# Altium PCB Electronic Dice.PcbDoc
Units mm, origin at the board's own origin, x right, y up, seen from the top; angles counter-clockwise.
Board outline 102.6 x 102.6 mm, 2 copper layers (Top Layer, Bottom Layer), stack 0.325 mm thick; 26 components, 21 nets, 81 pads, 0 vias.
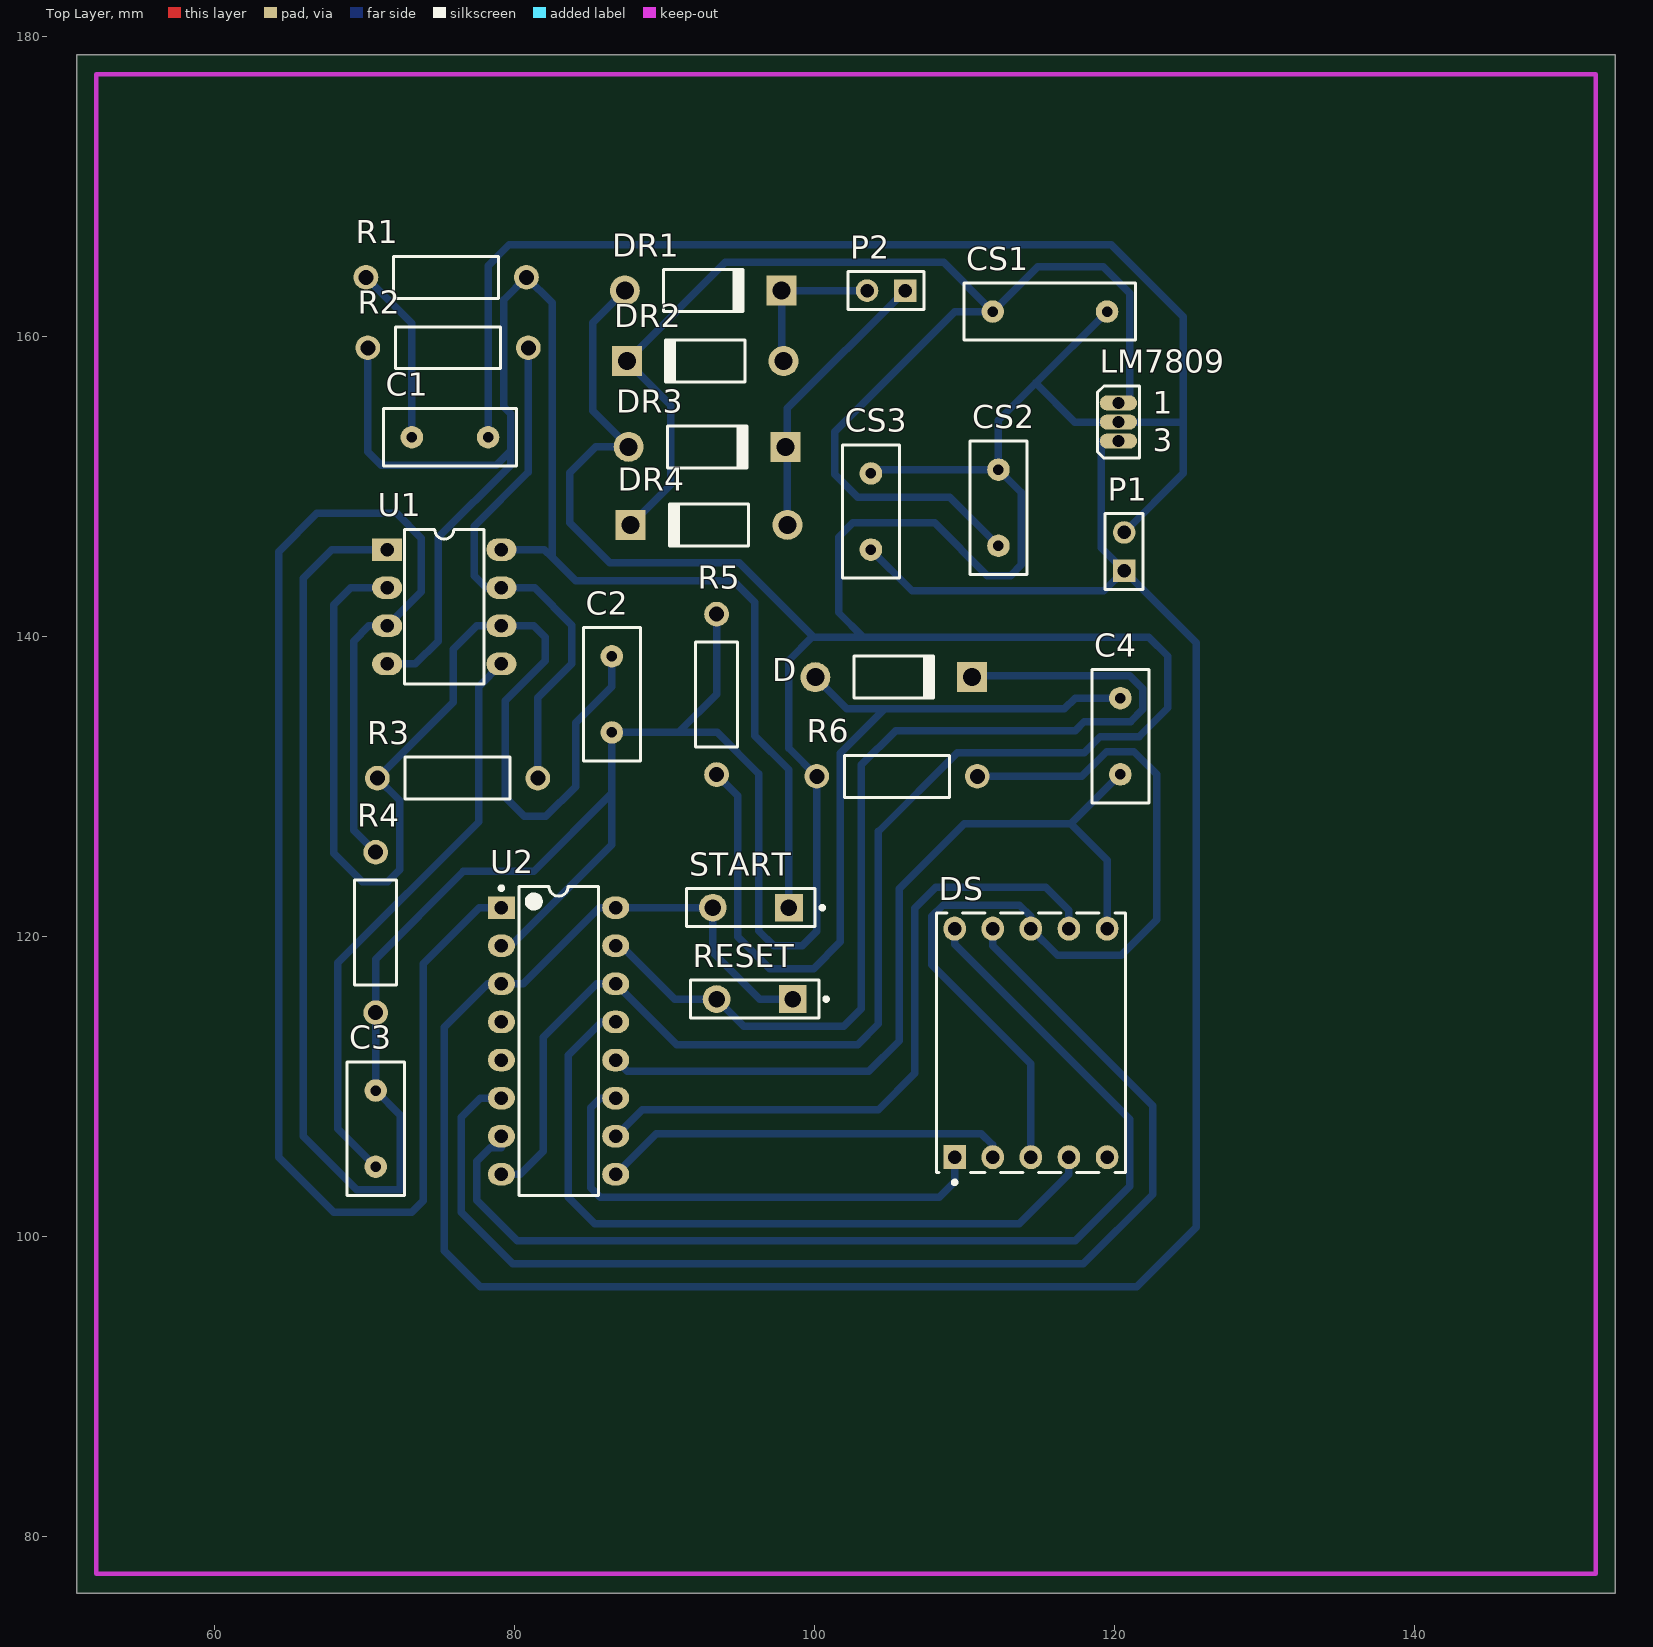
[diagram p0: Top Layer view]
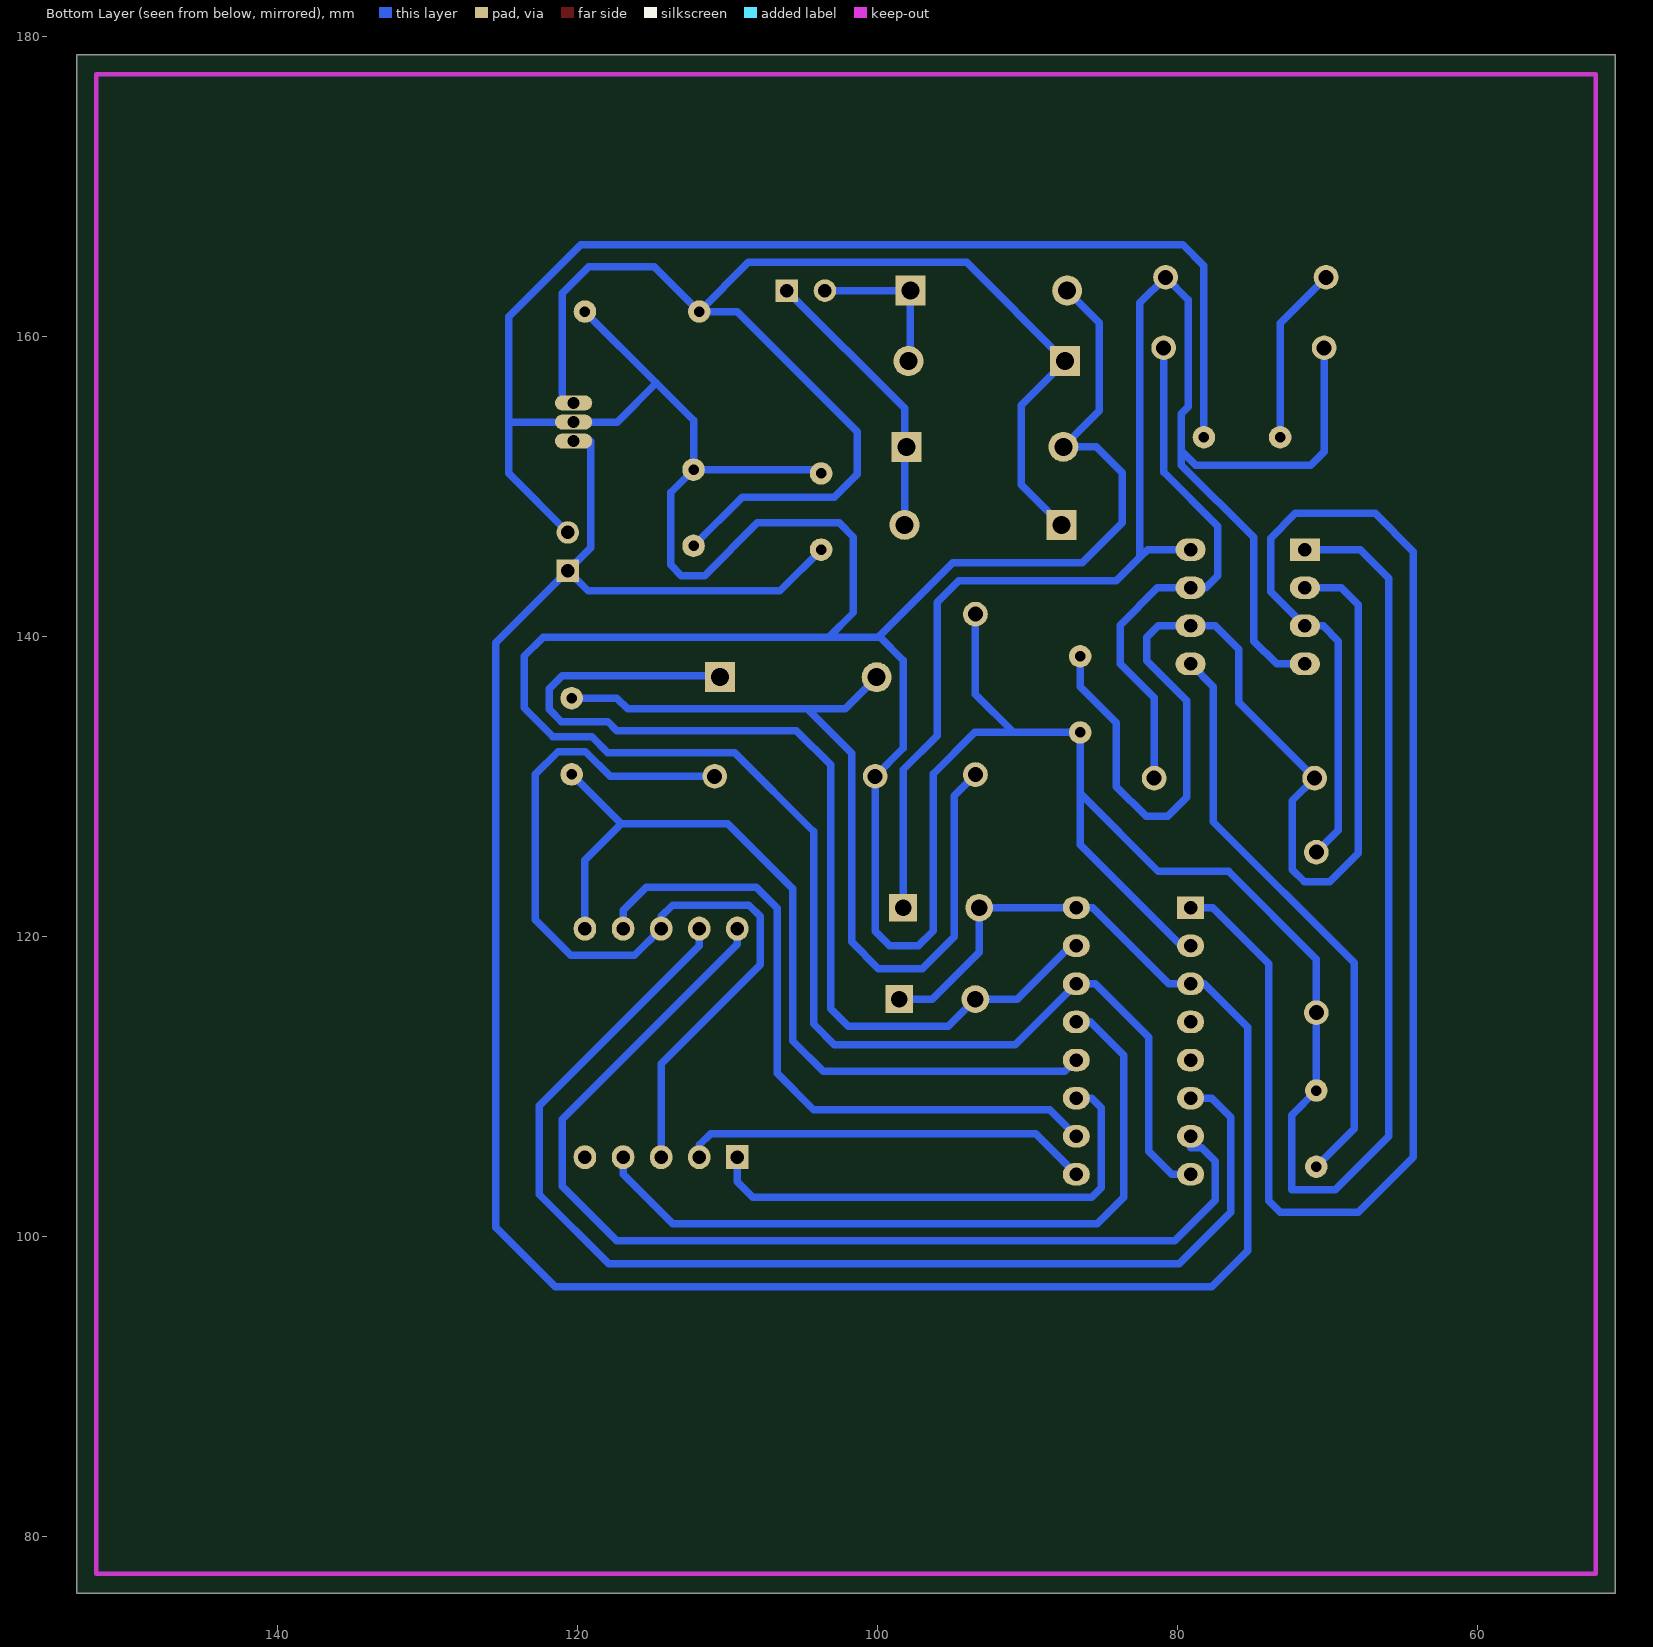
[diagram p1: Bottom Layer view, seen from below]

## Layer stack, top to bottom
Top Layer: signal copper 0.0356
Dielectric 1: core 0.254, FR-4, Dk 4.2
Bottom Layer: signal copper 0.0356

## Board outline
50.8,76.2 153.4,76.2 153.4,178.8 50.8,178.8

## Design rules (kind name [scope] priority, off if disabled: settings)
Clearance [All] p1: gap=0.5
PolygonConnect [All] p1: connectstyle=Relief reliefconductorwidth=0.254 reliefentries=4 polygonreliefangle="90 Angle" airgapwidth=0.254
RoomDefinition "Electronic Dice" [InComponentClass('Electronic Dice')] p1: confinementstyle=ConfineIn formatcopy=TRUE lockcomponents=FALSE outline 0,0 50.8,0 50.8,25.4 0,25.4
RoutingLayers [All] p1: top layer_v5=FALSE bottom layer_v5=TRUE
RoutingVias [All] p1: holewidth=0.3 width=0.6 viastyle="Through Hole" minholewidth=0.711 minwidth=1.27 maxholewidth=0.711 maxwidth=1.27
SolderMaskExpansion [All] p1: expansion=0.102
Width [All] p1: maxlimit=0.5 minlimit=0.5 preferedwidth=0.5
29 further rules are at their usual default settings.

## Components (designator, comment, footprint, x,y, rotation, side; value= is the part's Value field where it differs from the comment)
C1 "" RAD-0.2 75.692,153.289 r0 top
C2 "" RAD-0.2 86.487,136.144 r270 top
C3 "" RAD-0.2 70.739,107.188 r270 top
C4 "" RAD-0.2 120.396,133.35 r270 top
CS1 "" RAD-0.3 115.697,161.671 r0 top
CS2 "" RAD-0.2 112.268,148.59 r270 top
CS3 "" RAD-0.2 103.759,148.336 r270 top
D "Diode" DO-41 105.283,137.287 r0 top
DR1 "" DO-41 92.583,163.068 r0 top
DR2 "" DO-41 92.71,158.369 r180 top
DR3 "" DO-41 92.837,152.654 r0 top
DR4 "" DO-41 92.964,147.447 r180 top
DS "7 Segment Display" HDSP-51 114.427,112.903 r0 top (schematic designator DS2)
LM7809 "" E3 120.269,154.305 r0 top
P1 "9V" HDR1X2 120.65,144.399 r90 top
P2 "AC IN" HDR1X2 106.045,163.068 r180 top
R1 "" R6.35x2.3 75.438,163.957 r0 top
R2 "" R6.35x2.3 75.565,159.258 r180 top
R3 "" R6.35x2.3 76.2,130.556 r0 top
R4 "" R6.35x2.3 70.739,120.269 r90 top
R5 "" R6.35x2.3 93.472,136.144 r270 top
R6 "" R6.35x2.3 105.503,130.683 r0 top
RESET "SW-SPST" SPST-2 96.012,115.824 r180 top
START "SW-SPST" SPST-2 95.758,121.92 r180 top
U1 "NE555" 626-05 75.311,141.986 r270 top
U2 "4033" J16A 82.931,113.03 r0 top

## Footprints (in the part's own frame and the unit in brackets; to place one, negate y for a bottom-side part, rotate by r counter-clockwise, add the part's x,y. Pads: shape width x height; smd on the part's side, far side on the other; paste and mask are expansions set on the pad)
626-05 [mm] "DIP; 8 Leads; Row Spacing 7.62 mm; Pitch 2.54 mm"
  rect 1.5x2 hole 0.9: 1(-3.81,-3.81)
  oval 1.5x2 hole 0.9: 2(-1.27,-3.81) 3(1.27,-3.81) 4(3.81,-3.81) 5(3.81,3.81) 6(1.27,3.81) 7(-1.27,3.81) 8(-3.81,3.81)
  silkscreen extent -5.15,-2.65 5.15,2.65
DO-41 [mm] "Diode, Axial; Body 5.2 x 2.7 mm (LxDia. max), Lead Dia. 0.86 mm (max)"
  round 2 hole 1.2: 1(-5.23,0)
  rect 2x2 hole 1.2: 2(5.23,0)
  silkscreen extent -2.65,-1.4 2.75,1.4
E3 [mm] "TO, Flat Index; 3 In-Line, Axial Leads; Body Dia. 4.6mm; Lead Dia. 0.5 mm (max)"
  oval 2.5x1 hole 0.8: 1(0,1.27) 2(0,0) 3(0,-1.27)
  silkscreen extent -1.41,-2.41 1.41,2.41
HDR1X2 [mm] "Connector; Header; 2 Position"
  rect 1.5x1.5 hole 0.9: 1(0,0)
  round 1.5 hole 0.9: 2(2.54,0)
  silkscreen extent -1.27,-1.27 3.81,1.27
HDSP-51 [mm] "LED, 7-Segment Display, 14.27 mm, RHD; 10 Leads; Row Space 15.24 mm; Pitch 2.54 mm"
  rect 1.5x1.6 hole 0.9: 1(-5.08,-7.62)
  oval 1.5x1.6 hole 0.9: 2(-2.54,-7.62) 3(0,-7.62) 4(2.54,-7.62) 5(5.08,-7.62) 6(5.08,7.62) 7(2.54,7.62) 8(0,7.62) 9(-2.54,7.62) 10(-5.08,7.62)
  silkscreen extent -6.3,-9.42 6.3,8.65
J16A [mm] "DIP, 16-Leads, Row Spacing 7.62mm, Pitch 2.54mm, Body 19.56x6.73mm"
  rect 1.8x1.5 hole 0.9: 1(-3.81,8.89)
  oval 1.8x1.5 hole 0.9: 2(-3.81,6.35) 3(-3.81,3.81) 4(-3.81,1.27) 5(-3.81,-1.27) 6(-3.81,-3.81) 7(-3.81,-6.35) 8(-3.81,-8.89) 9(3.81,-8.89) 10(3.81,-6.35) 11(3.81,-3.81) 12(3.81,-1.27) 13(3.81,1.27) 14(3.81,3.81) 15(3.81,6.35) 16(3.81,8.89)
  silkscreen extent -3.93,-10.3 2.65,10.31, body extent -3.6,-10.28 3.6,10.28, height 5.08
R6.35x2.3 [mm] "Resistor, Axial; Body 7 x 2.8 mm (LxDia. max), Lead Dia. 0.7 mm (max)"
  round 1.65 hole 1: 1(-5.35,0) 2(5.35,0)
  silkscreen extent -3.5,-1.4 3.5,1.4
RAD-0.2 [mm] "Radial Cap, Thru-Hole; 2 Leads; 0.2 in Pin Spacing"
  round 1.5 hole 0.7: 1(-2.54,0) 2(2.54,0)
  silkscreen extent -4.44,-1.91 4.44,1.91
RAD-0.3 [mm] "Radial Cap, Thru-Hole; 2 Leads; 0.3 in Pin Spacing"
  round 1.5 hole 0.7: 1(-3.81,0) 2(3.81,0)
  silkscreen extent -5.71,-1.91 5.71,1.91
SPST-2 [mm] "Switch; 2 Leads"
  rect 1.85x1.85 hole 1.1: 1(-2.54,0)
  round 1.85 hole 1.1: 2(2.54,0)
  silkscreen extent -4.89,-1.27 4.28,1.27

## Part data
C1 C2 CS1: library part "Cap Pol1", "Polarized Capacitor (Radial)"
C3 C4 CS2 CS3: library part Cap, "Capacitor"
D: "Default Diode"
DR1 DR2 DR3 DR4: library part "Diode 1N4007", "1 Amp General Purpose Rectifier"
DS: library part HDSP-513G, "14.22 mm General Purpose Green 7-Segment Display: CC, RH DP"
LM7809: library part "Volt Reg", "Voltage Regulator"
P1 P2: library part "Header 2", "Header, 2-Pin"
R1 R2 R3 R4 R5 R6: library part ERG12, "Metal Oxide Film Resistor, 0.1 Ohm to 47k Ohm Range, 2% and 5% Tolerance, 0.5 W"
RESET START: "Single-Pole, Single-Throw Switch"
U1: library part MC1455BP1, "Timing Circuit"
U2: library part 54F161ADM, "Synchronous Presettable Binary Counter"

## Nets (pads, with @x,y where several pads share a name; then routed paths per layer and width w, separated by ;. In a path a pad name is that pad's centre, name@x,y a point inside that pad or via, vN(x,y) a via of type N, cw(c..) or ccw(c..) an arc to the next point about the centre after c; other vN are vias at no path point)
GND: C1.2 C2.2 C3.1 CS1.2 CS2.1 CS3.1 DR1.1 DR3.1 LM7809.2 P1.2 R4.1 R5.1 R6.1 U1.1 U2.2 U2.8 U2.14 | length 444.2
  Bottom Layer w0.5: U1.1 67.818,145.796 65.913,143.891 65.913,106.68 69.469,103.124 72.39,103.124 72.39,108.077 C3.1 R4.1 70.739,118.491 76.581,124.333 81.28,124.333 86.487,129.54 ; C1.2 78.232,164.719 79.629,166.116 119.786,166.116 124.587,161.315 124.587,154.305 ; U2.8 80.391,104.14 81.915,105.664 81.915,113.284 85.471,116.84 U2.14 90.805,112.776 102.87,112.776 104.267,114.173 104.267,127 109.525,132.258 117.991,132.258 119.067,133.334 121.65,133.334 123.571,135.255 123.571,138.684 122.301,139.954 103.251,139.954 ; U2.2 79.756,119.38 86.487,126.111 86.487,129.54 ; DR1.1 85.217,160.932 85.217,155.044 DR3.1 85.42,152.654 83.693,150.927 83.693,147.599 86.36,144.932 94.971,144.932 99.949,139.954 ; R5.1 93.472,136.144 90.932,133.604 C2.2 ; CS3.1 104.013,151.13 CS2.1 ; CS1.2 114.745,156.909 ; P1.2 124.587,150.876 124.587,154.305 ; 86.487,129.54 C2.2 ; C2.2 93.523,133.604 96.266,130.861 96.266,120.396 97.282,119.38 99.187,119.38 100.153,120.346 R6.1 98.298,132.538 98.298,138.43 99.822,139.954 99.949,139.954 ; 99.949,139.954 103.251,139.954 ; 103.251,139.954 101.6,141.605 101.6,146.634 102.54,147.574 108.026,147.574 111.531,144.069 113.081,144.069 113.792,144.78 113.792,149.606 CS2.1 ; CS2.1 112.268,154.432 114.745,156.909 ; 114.745,156.909 117.348,154.305 LM7809.2 124.587,154.305
NetC1_1: C1.1 R1.1 | length 11.9
  Bottom Layer w0.5: R1.1 73.152,160.893 C1.1
NetC2_1: C2.1 R3.1 U1.2 U1.6 | length 78.1
  Bottom Layer w0.5: U1.2 69.088,143.256 67.945,142.113 67.945,125.552 69.85,123.647 71.526,123.647 72.339,124.46 72.339,129.067 R3.1 75.921,135.627 75.921,139.167 77.47,140.716 U1.6 81.28,140.716 82.042,139.954 82.042,138.379 79.375,135.712 79.375,129.286 80.645,128.016 82.093,128.016 84.074,129.997 84.074,134.239 86.487,136.652 C2.1
NetC3_2: C3.2 U1.5 | length 39.1
  Bottom Layer w0.5: C3.2 68.199,107.188 68.199,118.237 77.597,127.635 77.597,136.652 U1.5
NetC4_1: C4.1 D.1 R5.2 | length 58.1
  Bottom Layer w0.5: R5.2 94.893,129.373 94.893,119.991 97.028,117.856 99.949,117.856 101.728,119.635 101.728,131.335 101.727,132.207 104.699,135.179 ; D.1 102.161,135.179 104.699,135.179 ; C4.1 117.373,135.89 116.662,135.179 104.699,135.179
NetC4_2: C4.2 DS.6 U2.12 | length 56.1
  Bottom Layer w0.5: U2.12 87.503,110.998 103.632,110.998 105.664,113.03 105.664,123.19 109.982,127.508 117.094,127.508 ; DS.6 119.507,125.095 117.094,127.508 ; C4.2 117.094,127.508
NetCS1_1: CS1.1 CS2.2 DR2.2 DR4.2 LM7809.1 | length 90.5
  Bottom Layer w0.5: DR4.2 90.424,150.137 90.424,155.425 DR2.2 94.059,164.948 108.61,164.948 CS1.1 ; CS2.2 109.022,149.296 102.875,149.296 101.346,150.825 101.346,153.67 109.347,161.671 CS1.1 ; LM7809.1 121.019,155.575 121.019,162.902 119.253,164.668 114.884,164.668 CS1.1
NetD_2: D.2 RESET.2 U2.15 | length 68.8
  Bottom Layer w0.5: U2.15 87.122,119.38 90.678,115.824 RESET.2 95.275,114.021 101.956,114.021 103.124,115.189 103.124,131.445 105.41,133.731 117.375,133.731 117.978,134.334 121.075,134.334 121.896,135.155 121.896,136.511 121.017,137.39 110.616,137.39 D.2
NetDR1_2: DR1.2 DR2.1 P2.2 | length 10.4
  Bottom Layer w0.5: DR2.1 97.813,158.496 DR1.2 P2.2
NetDR3_2: DR3.2 DR4.1 P2.1 | length 19
  Bottom Layer w0.5: DR3.2 DR3.2@98.194,152.654 ; DR4.1 DR3.2@98.194,152.654 ; P2.1 98.194,155.217 DR3.2@98.194,152.654
NetDS_1: DS.1 U2.11 | length 33.8
  Bottom Layer w0.5: U2.11 85.725,109.22 85.09,108.585 85.09,103.251 85.725,102.616 108.331,102.616 109.347,103.632 DS.1
NetDS_2: DS.2 U2.9 | length 27.4
  Bottom Layer w0.5: U2.9 89.459,106.858 111.125,106.858 111.887,106.096 DS.2
NetDS_3: DS.3 DS.8 R6.2 | length 59.9
  Bottom Layer w0.5: R6.2 117.831,130.683 119.482,132.334 121.285,132.334 122.809,130.81 122.809,121.107 120.447,118.745 116.205,118.745 DS.8 114.427,121.336 113.665,122.098 108.585,122.098 107.823,121.336 107.823,118.11 114.427,111.506 DS.3
NetDS_4: DS.4 U2.13 | length 50.2
  Bottom Layer w0.5: U2.13 85.801,114.3 83.566,112.065 83.566,102.616 85.344,100.838 113.665,100.838 116.967,104.14 DS.4
NetDS_7: DS.7 U2.10 | length 45.4
  Bottom Layer w0.5: U2.10 88.519,108.458 104.267,108.458 106.68,110.871 106.68,121.896 108.073,123.289 115.434,123.289 116.967,121.756 DS.7
NetDS_9: DS.9 U2.6 | length 81.1
  Bottom Layer w0.5: U2.6 77.724,109.22 76.454,107.95 76.454,101.6 79.883,98.171 117.932,98.171 122.555,102.794 122.555,108.712 111.887,119.38 DS.9
NetDS_10: DS.10 U2.7 | length 73.6
  Bottom Layer w0.5: U2.7 79.121,105.918 78.384,105.918 77.47,105.004 77.47,102.413 80.188,99.695 117.373,99.695 121.031,103.353 121.031,107.798 109.347,119.482 DS.10
NetR1_2: R1.2 R2.2 START.1 U1.4 U1.8 | length 107.4
  Bottom Layer w0.5: R2.2 70.215,152.332 71.111,151.436 78.768,151.436 79.732,152.4 ; U1.4 73.381,138.176 74.905,139.7 74.905,146.609 79.732,151.436 79.732,152.4 ; U1.8 81.989,145.796 82.499,145.285 ; START.1 98.298,131.115 96.028,133.385 96.028,142.275 94.592,143.711 84.074,143.711 82.499,145.285 ; 79.732,152.4 79.732,154.864 79.273,155.322 79.273,162.442 R1.2 82.499,162.246 82.499,145.285
NetR2_1: R2.1 R3.2 U1.7 | length 35.7
  Bottom Layer w0.5: R2.1 80.915,150.972 77.311,147.368 77.311,144.05 78.105,143.256 U1.7 81.331,143.256 83.82,140.767 83.82,138.2 81.55,135.93 R3.2
NetR4_2: R4.2 U1.3 U2.1 | length 109.9
  Bottom Layer w0.5: R4.2 69.266,127.092 69.266,139.7 70.282,140.716 U1.3 73.787,143.002 73.787,146.558 72.136,148.209 66.802,148.209 64.262,145.669 64.262,105.283 67.945,101.6 73.152,101.6 73.914,102.362 73.914,118.192 77.642,121.92 U2.1
VCC: CS3.2 LM7809.3 P1.1 RESET.1 START.2 U2.3 U2.16 | length 173.3
  Bottom Layer w0.5: RESET.1 96.348,115.824 93.218,118.954 START.2 U2.16 85.649,121.92 80.569,116.84 U2.3 78.207,116.84 75.311,113.944 75.311,99.035 77.699,96.647 121.488,96.647 125.451,100.609 125.451,139.598 P1.1 ; CS3.2 106.516,143.039 119.29,143.039 P1.1 ; LM7809.3 119.126,153.035 119.126,145.923 P1.1
pads on no net: DS.5 U2.4 U2.5

## Keep-outs
Keep-Out Layer:
  lines w0.3: 52.1,77.5 152.1,77.5 152.1,177.5 52.1,177.5 52.1,77.5

## Silkscreen, mask and mechanical layers (free items; w line width, h text height)
Drill Drawing:
  text ".LEGEND" at 158.48,81.28 h1.52
  text "Drill Drawing." at 158.48,78.74 h1.52

## Dimensions
52.1,77.5 to 152.1,77.5 on Mechanical 1
52.1,77.5 to 52.1,177.5 on Mechanical 1

## Text inside footprints (layer, text, board x,y; h text height)
LM7809: Top Overlay "3" at 122.544,152.342 h1.5; Top Overlay "1" at 122.544,154.86 h1.5